# EAGLE board pcbEagle (EAGLE 9.6.2)
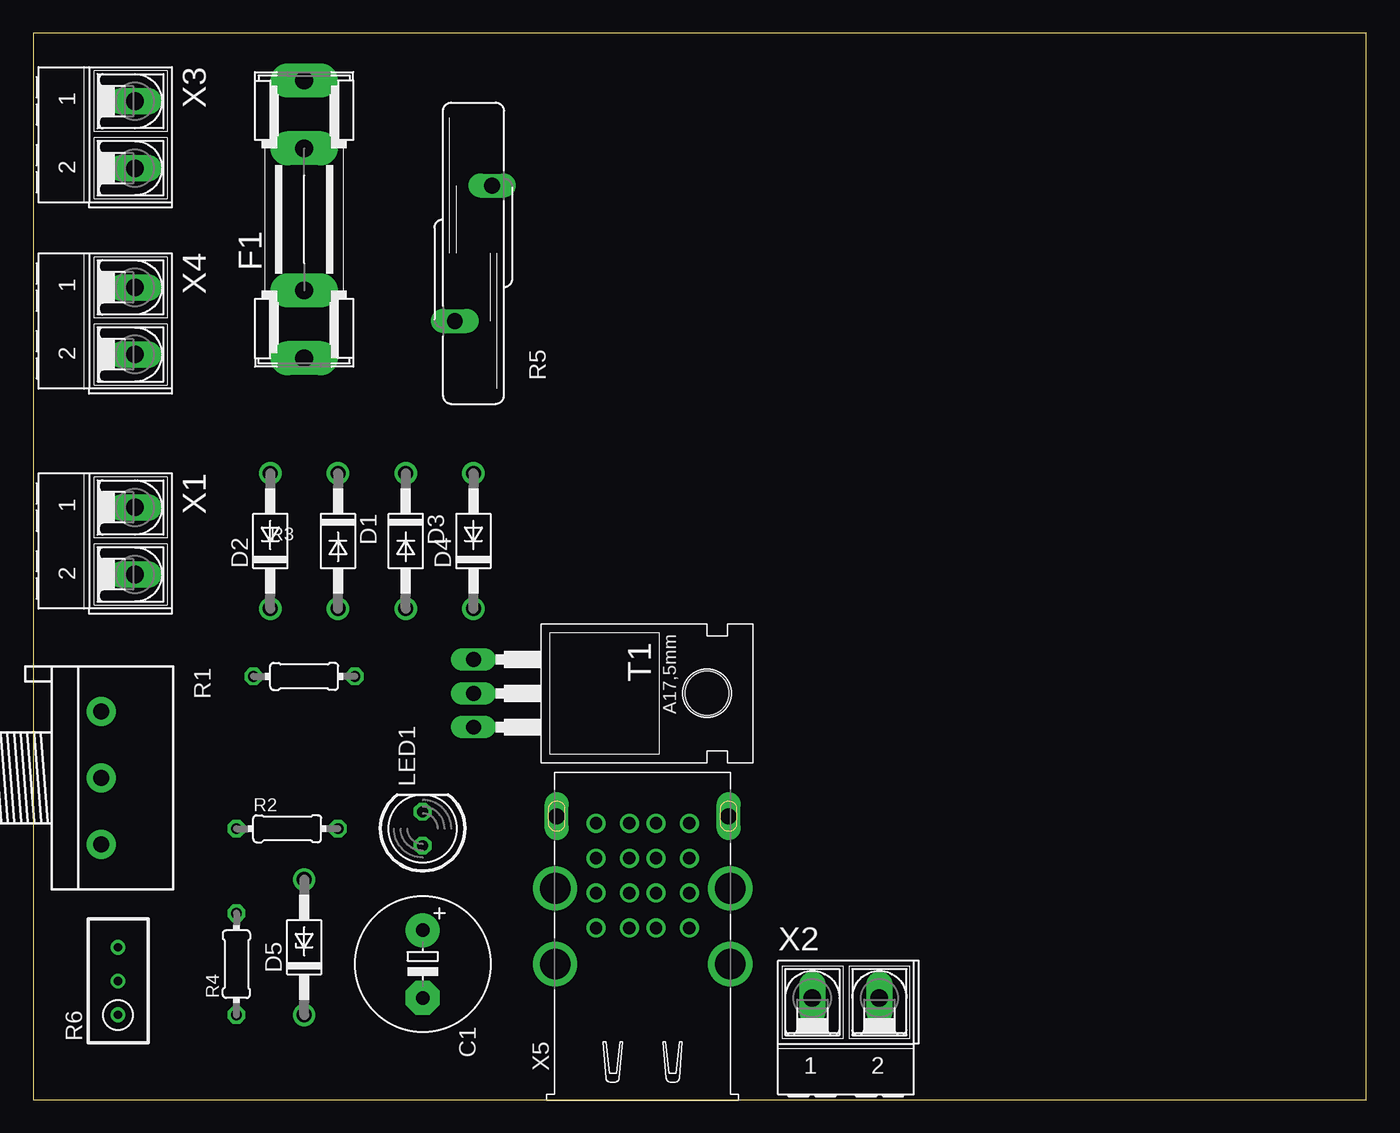
[diagram p0: board, top side]
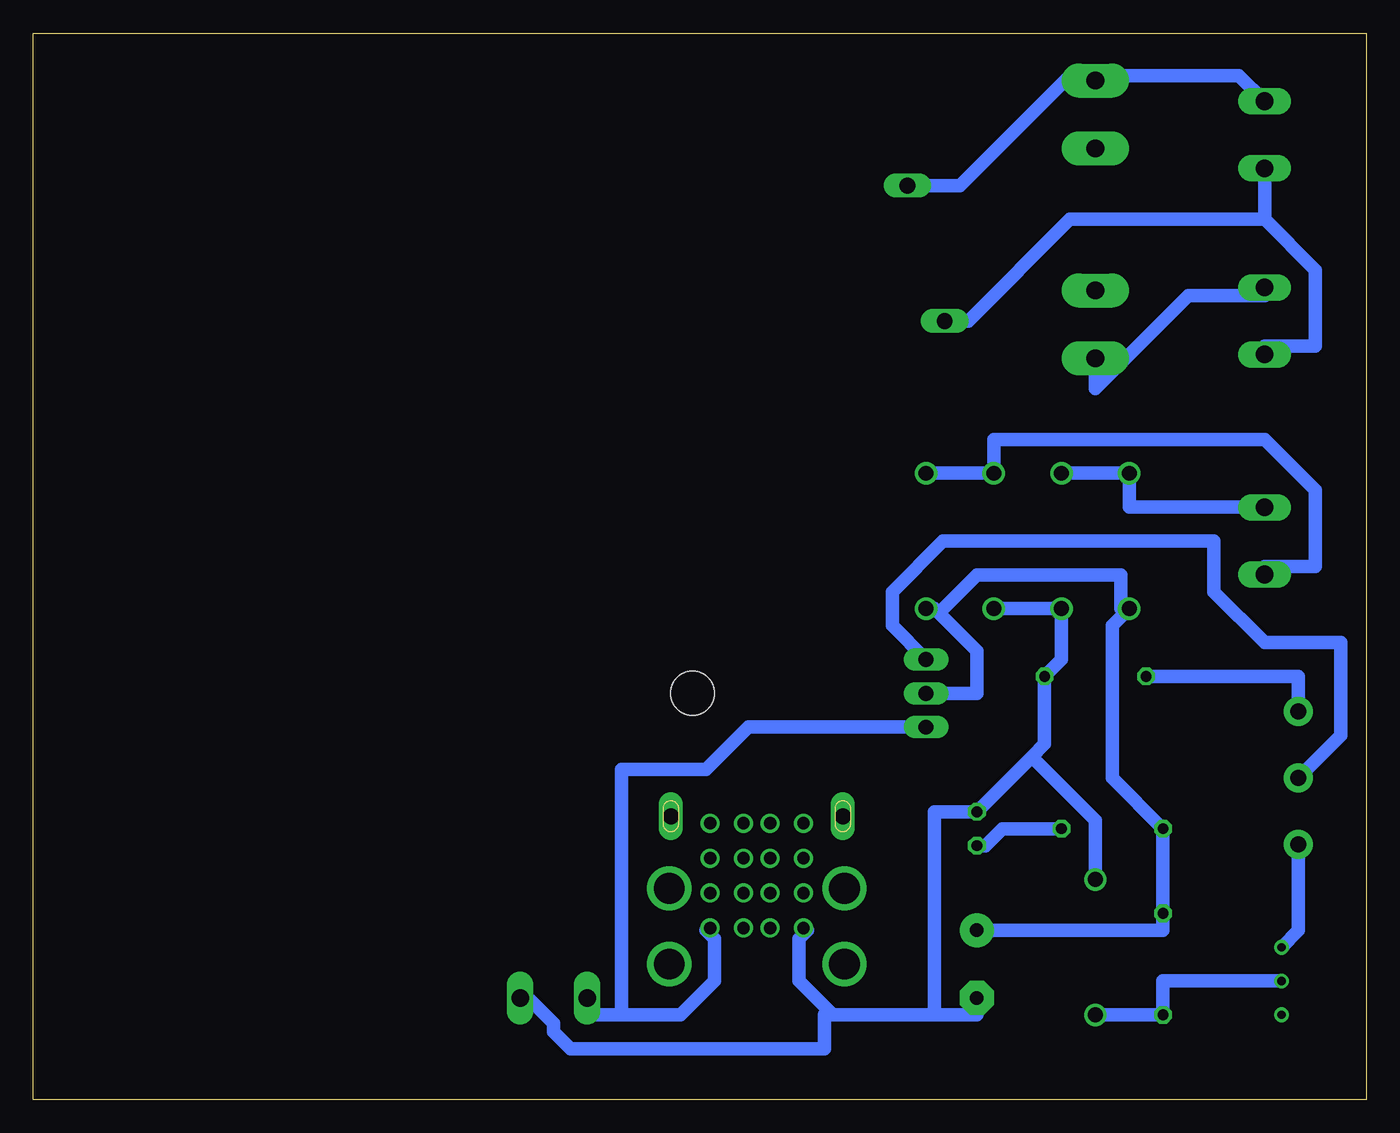
[diagram p1: board, bottom side, seen from below]

Size 100 x 80 mm. Coordinates in mm from the lower left corner, seen from the top.
Outline: 0,0 100,0 100,80 0,80 0,0
Copper layers (1*16): Top 0.035mm / dielectric 1.5mm / Bottom 0.035mm
Design rules "default *": minimum track width 40mil, minimum drill 0.35mm, track to track 40mil, track to pad 40mil, pad to pad 40mil, via to via 40mil, smd to smd 6mil, copper to edge 40mil, drill to drill 6mil, minimum pad ring 10mil, minimum via ring 8mil, stop-mask expansion 4mil, vias tented up to drill 0mil, thermal gap 10mil

## Footprints (pad centres in the part's own frame; a part is rotated, then mirrored left to right if it is on the bottom)
E5-10,5 = drill 1.016 pad 2.54: + -2.54,0 | drill 1.016 pad 2.54 octagon: - 2.54,0
DO41-10 = drill 1.118: A 5.08,0; C -5.08,0
DO41Z10 = drill 1.118: A 5.08,0; C -5.08,0
SHK20L = drill 1.321 pad 2.54 long: 1A -10.414,0; 1B -5.334,0; 2A 10.414,0; 2B 5.334,0
LED5MM = drill 0.813 octagon: A -1.27,0; K 1.27,0
3RP/1610N = drill 1.2 pad 2.184: 1 -5,0; 2 0,0; 3 5,0
0204/7 = drill 0.813 octagon: 1 -3.81,0; 2 3.81,0
S20K230 = drill 1.194 long: 1 -1.397,-5.08; 2 1.397,5.08
RTRIM3296W = drill 0.61: 1 0,-2.54; 2 0,0; 3 0,2.54
TO220 = drill 1.118 long: 1 -2.54,-6.35; 2 0,-6.35; 3 2.54,-6.35 | hole 3.302: 0,11.176
AK500/2-H = drill 1.321 long: 1 -2.515,0; 2 2.515,0
32003-40XA = drill 0.92 pad 1.27: 1-1 2.71,-3.5; 1-2 2.71,-1; 1-3 2.71,1; 1-4 2.71,3.5; 2-1 5.33,-3.5; 2-2 5.33,-1; 2-3 5.33,1; 2-4 5.33,3.5; 3-1 7.95,-3.5; 3-2 7.95,-1; 3-3 7.95,1; 3-4 7.95,3.5; 4-1 10.57,-3.5; 4-2 10.57,-1; 4-3 10.57,1; 4-4 10.57,3.5 | drill 2.3 pad 3: M1 0,6.57; M2 0,-6.57; M3 5.68,6.57; M4 5.68,-6.57 | drill 1.2 pad 1.6 long: M5 11.1,6.45; M6 11.1,-6.45

## Placement (x,y rotation side)
C1  1mF  [E5-10,5]  29.21,10.16 270 top
D1  1N4004  [DO41-10]  22.86,41.91 270 top
D2  1N4004  [DO41-10]  17.78,41.91 90 top
D3  1N4004  [DO41-10]  27.94,41.91 270 top
D4  1N4004  [DO41-10]  33.02,41.91 90 top
D5  1N4728  [DO41Z10]  20.32,11.43 90 top
F1  [SHK20L]  20.32,66.04 90 top
LED1  LEDVermelho  [LED5MM]  29.21,20.32 90 top
R1  5k  [3RP/1610N]  5.08,24.13 270 top
R2  8k2  [0204/7]  19.05,20.32 0 top
R3  2k2  [0204/7]  20.32,31.75 0 top
R4  82  [0204/7]  15.24,10.16 90 top
R5  S20K230  [S20K230]  33.02,63.5 0 top
R6  [RTRIM3296W]  6.35,8.89 0 top
T1  TIP31C  [TO220]  39.37,30.48 270 top
X1  [AK500/2-H]  7.62,41.91 270 top
X2  [AK500/2-H]  60.96,7.62 0 top
X3  [AK500/2-H]  7.62,72.39 270 top
X4  [AK500/2-H]  7.62,58.42 270 top
X5  USB_4-32003-40XA  [32003-40XA]  45.72,10.16 90 top

## Library data of the parts
C1 = rcl; SPICEPREFIX: C
D1-D5 = diode
F1 = fuse; OC_FARNELL: unknown; OC_NEWARK: unknown
LED1 = led
R1 = pot
R2-R4 = rcl; SPICEPREFIX: R
R5 = varistor
R6 = rcl; SPICEMODEL: X; SPICEPREFIXL: POT
T1 = transistor-neu-to92
X1-X4 = con-ptr500; OC_FARNELL: unknown; OC_NEWARK: unknown
X5 = con-cypressindustries; OC_FARNELL: unknown; OC_NEWARK: unknown

## Nets
N$1: C1.- D1.A D3.A D5.A LED1.K R3.2 X2.2 X5.1-4
N$2: D1.C D2.A X1.1
N$3: C1.+ D2.C D4.C R2.1 R4.2 T1.2
N$4: D3.C D4.A X1.2
N$5: LED1.A R2.2
N$6: D5.C R4.1 R6.2
N$7: R1.3 R6.3
N$8: R1.1 R3.1
N$9: R1.2 T1.1
N$10: T1.3 X2.1 X5.1-1
N$11: F1.1A X4.1
N$12: R5.1 X3.2 X4.2
N$13: F1.2A R5.2 X3.1

## Tracks (layer width: path | path; a pad name or v marks a point on that pad's centre or on a via)
N$1
  Bottom 1.016: 25.08,25.72 24.13,26.67 R3.2 22.86,33.02 D1.A D3.A | 25.08,25.72 LED1.K 32.38,21.59 32.38,6.35 | D5.A 20.32,20.95 25.08,25.72 | 40.32,6.67 40.01,6.35 32.38,6.35 | 40.32,6.67 42.55,8.89 42.55,12.06 41.91,12.7 X5.1-4 | 32.38,6.35 29.21,6.35 C1.- | X2.2 62.87,7.62 60.96,5.71 60.96,5.08 59.69,3.81 40.64,3.81 40.64,6.35 40.32,6.67
N$2
  Bottom 1.016: D1.C D2.A 17.78,44.45 7.62,44.45 X1.1
N$3
  Bottom 1.016: T1.2 29.21,30.48 29.21,33.66 32.07,36.51 | 32.07,36.51 32.38,36.83 D4.C | C1.+ 15.24,12.7 R4.2 R2.1 19.05,24.13 19.05,35.56 D2.C 18.41,36.83 18.41,39.37 29.21,39.37 32.07,36.51
N$4
  Bottom 1.016: D4.A D3.C 27.94,49.53 7.62,49.53 3.81,45.72 3.81,40.01 7.62,40.01 X1.2
N$5
  Bottom 1.016: R2.2 27.3,20.32 28.57,19.05 LED1.A
N$6
  Bottom 1.016: R6.2 15.24,8.89 R4.1 D5.C
N$7
  Bottom 1.016: R6.3 5.08,12.7 R1.3
N$8
  Bottom 1.016: R3.1 5.08,31.75 R1.1
N$9
  Bottom 1.016: T1.1 35.56,35.56 35.56,38.1 31.75,41.91 11.43,41.91 11.43,38.1 7.62,34.29 1.91,34.29 1.91,27.3 R1.2
N$10
  Bottom 1.016: 55.88,6.35 58.42,6.35 58.42,7.62 X2.1 | 55.88,6.35 51.44,6.35 48.9,8.89 48.9,12.06 49.53,12.7 X5.1-1 | T1.3 46.35,27.94 49.53,24.77 55.88,24.77 55.88,6.35
N$11
  Bottom 1.016: F1.1A 20.32,53.34 13.34,60.33 7.62,60.33 X4.1
N$12
  Bottom 1.016: 7.62,66.04 22.23,66.04 29.84,58.42 R5.1 | X3.2 7.62,66.04 | 7.62,66.04 3.81,62.23 3.81,56.52 7.62,56.52 X4.2
N$13
  Bottom 1.016: R5.2 30.48,68.58 22.23,76.83 20.7,76.83 F1.2A 19.94,76.83 9.55,76.83 X3.1